# EAGLE board riffle-CTL-0.2-throughhole (EAGLE 7.3.0)
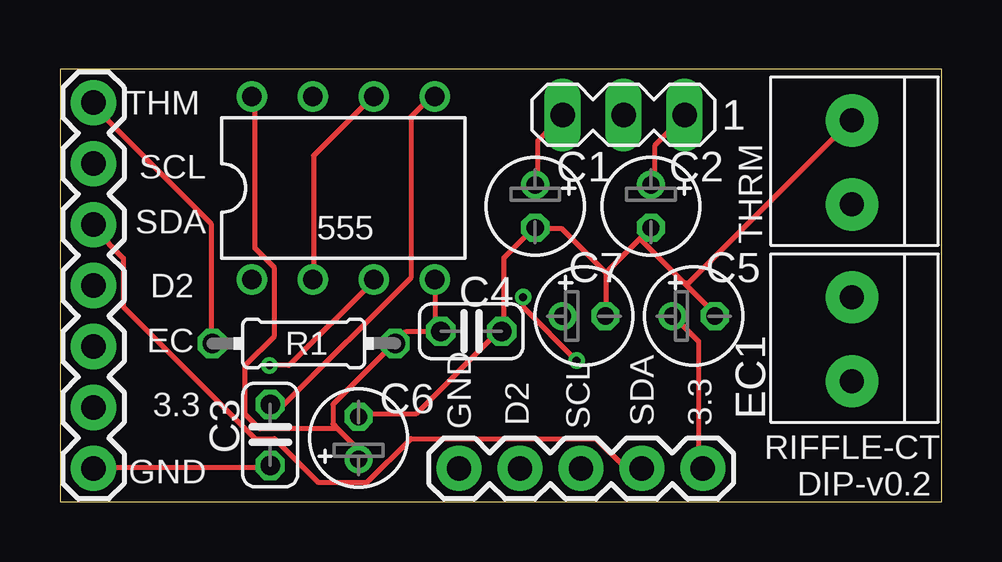
[diagram p0: board, top side]
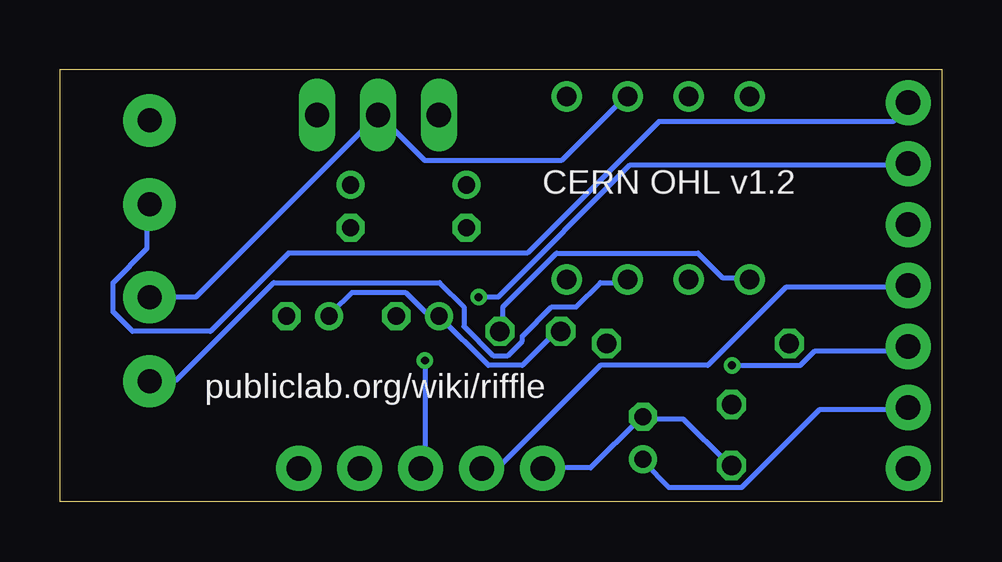
[diagram p1: board, bottom side, seen from below]

Size 36.75 x 18.02 mm. Coordinates in mm from the lower left corner, seen from the top.
Outline: 0,0 36.75,0 36.75,18.02 0,18.02 0,0
Copper layers (1*16): Top 0.0356mm / dielectric 1.5011mm / Bottom 0.0356mm
Design rules "LaenPCBOrder": minimum track width 6mil, minimum drill 13mil, track to track 6mil, track to pad 6mil, pad to pad 6mil, via to via 6mil, smd to smd 6mil, copper to edge 15mil, drill to drill 6mil, minimum pad ring 7mil, minimum via ring 7mil, stop-mask expansion 3mil, vias tented up to drill 0mil, thermal gap 10mil
Net classes: 0 default: width 0.203 mm, drill 0.33 mm, clearance 0.203 mm; 1 power: width 0.381 mm, clearance 0.254 mm

## Footprints (pad centres in the part's own frame; a part is rotated, then mirrored left to right if it is on the bottom)
E1,8-4 = drill 0.711 pad 1.168: + -0.889,0 | drill 0.711 pad 1.168 octagon: - 0.889,0
C025-024X044 = drill 0.813 octagon: 1 -1.27,0; 2 1.27,0
1X2-3.5MM = drill 1 pad 2.184: 1 1.8,0; 2 -1.7,0
DIL08 = drill 0.813 pad 1.27: 1 -3.81,-3.81; 2 -1.27,-3.81; 3 1.27,-3.81; 4 3.81,-3.81; 5 3.81,3.81; 6 1.27,3.81; 7 -1.27,3.81; 8 -3.81,3.81
1X07 = drill 1.016 pad 1.88: 1 0,0; 2 2.54,0; 3 5.08,0; 4 7.62,0; 5 10.16,0; 6 12.7,0; 7 15.24,0
1X05 = drill 1.016 pad 1.88: 1 0,0; 2 2.54,0; 3 5.08,0; 4 7.62,0; 5 10.16,0
0204/7 = drill 0.813 octagon: 1 -3.81,0; 2 3.81,0
MA03-1 = drill 1.016 long: 1 -2.54,0; 2 0,0; 3 2.54,0

## Placement (x,y rotation side)
C1  10µ  [E1,8-4]  19.81,12.32 270 top
C2  .1  [E1,8-4]  24.64,12.32 270 top
C3  0.01µ  [C025-024X044]  8.76,2.79 90 top
C4  0.1µ  [C025-024X044]  17.14,7.11 0 top
C5  .1µ  [E1,8-4]  26.42,7.75 0 top
C6  1u  [E1,8-4]  12.45,2.67 90 top
C7  10µ  [E1,8-4]  21.84,7.75 0 top
EC1  1X2-3.5MM  [1X2-3.5MM]  33.02,6.73 90 top
IC1  LM555N  [DIL08]  11.81,13.08 0 top
JP1  [1X07]  1.4,16.64 270 top
JP2  [1X05]  16.64,1.4 0 top
R1  10k  [0204/7]  10.16,6.6 0 top
SV1  [MA03-1]  23.5,16.13 180 top
THRM  1X2-3.5MM  [1X2-3.5MM]  33.02,14.1 90 top

## Library data of the parts
C1-C7 R1 = resistor
EC1 THRM = adafruit
IC1 = linear
JP1 JP2 = SparkFun-Connectors
SV1 = con-lstb; OC_FARNELL: unknown; OC_NEWARK: unknown

## Nets
D2: JP1.4 JP2.2
EC: EC1.2 IC1.3 JP1.5
GND: C1.- C2.- C3.1 C4.2 C5.- C6.- C7.- IC1.1 JP1.7 JP2.1 THRM.1
N$1: C1.+ SV1.3
N$3: EC1.1 IC1.2 IC1.6 SV1.2
N$4: C2.+ SV1.1
N$7: C3.2 IC1.5
SCL: JP1.2 JP2.3
SDA: JP1.3 JP2.4
THRM: JP1.1 R1.1 THRM.2
VCC: C4.1 C5.+ C6.+ C7.+ IC1.4 IC1.8 JP1.6 JP2.5 R1.2

## Tracks (layer width: path | path; a pad name or v marks a point on that pad's centre or on a via)
D2
  Bottom 0.203: JP2.2 19.1,1.42 18.49,1.42 14.22,5.69 9.75,5.69 6.5,8.94 1.42,8.94 JP1.4
EC  (via drill 0.33)
  Top 0.203: v8.74,5.69 9.55,5.69 13.01,9.14 IC1.3
  Bottom 0.203: IC1.3 13.21,9.14 14.22,9.14 15.24,8.13 16.26,8.13 17.48,6.91 17.48,6.71 18.09,6.1 18.69,6.1 19.91,7.32 19.91,8.13 20.93,9.14 27.84,9.14 31.9,5.08 32.92,5.08 EC1.2 | v8.74,5.69 5.89,5.69 5.28,6.3 1.42,6.3 JP1.5
GND
  Top 0.203: JP1.7 1.42,1.42 8.74,1.42 C3.1 | 22.76,9.55 22.76,7.92 C7.- | C2.- 24.18,10.97 | 24.18,10.97 22.76,9.55 | 24.18,10.97 26.01,9.14 | 26.01,9.14 27.23,7.92 C5.- | 22.76,9.55 20.93,11.38 19.91,11.38 C1.- 19.71,11.38 18.49,10.16 18.49,7.11 C4.2 18.29,7.11 14.83,3.66 12.6,3.66 C6.- | 26.01,9.14 26.21,9.14 32.92,15.85 THRM.1
  Bottom 0.203: C3.1 8.94,1.63 10.77,3.45 12.39,3.45 C6.- 12.6,3.45 14.63,1.42 16.46,1.42 JP2.1 | IC1.1 8.13,9.35 9.14,9.35 10.16,10.36 16.05,10.36 18.29,8.13 18.29,7.11 C4.2
N$1
  Top 0.203: C1.+ 19.91,13.21 19.91,15.04 20.93,16.05 SV1.3
N$3
  Top 0.203: IC1.2 10.57,9.35 10.57,14.43 13.01,16.87 IC1.6
  Bottom 0.203: IC1.6 13.21,16.87 15.85,14.22 21.54,14.22 23.37,16.05 SV1.2 31.09,8.53 32.92,8.53 EC1.1
N$4
  Top 0.203: C2.+ 24.79,13.21 24.79,14.83 26.01,16.05 SV1.1
N$7
  Top 0.203: C3.2 9.35,4.06 14.63,9.35 14.63,16.05 15.44,16.87 IC1.5
SCL  (via drill 0.33)
  Top 0.203: v21.54,5.89 19.3,8.13 v19.3,8.53
  Bottom 0.203: v21.54,5.89 21.54,1.42 JP2.3 | v19.3,8.53 18.49,8.53 13.01,14.02 1.42,14.02 JP1.2
SDA
  Top 0.203: JP2.4 24.18,1.42 23.57,1.42 22.35,2.64 14.63,2.64 12.8,0.81 10.77,0.81 8.94,2.64 8.13,2.64 2.64,8.13 2.64,10.16 1.42,11.38 JP1.3
THRM
  Top 0.203: R1.1 6.3,6.71 6.3,11.58 1.42,16.46 JP1.1
  Bottom 0.203: THRM.2 33.12,12.39 33.12,10.57 34.54,9.14 34.54,7.92 33.73,7.11 30.48,7.11 27.23,10.36 17.27,10.36 11.79,15.85 2.03,15.85 1.42,16.46 JP1.1
VCC
  Top 0.203: JP2.5 26.62,1.42 26.62,6.71 25.6,7.72 C5.+ | 11.58,3.05 11.38,3.25 11.38,4.06 13.82,6.5 R1.2 14.02,6.71 14.43,7.11 15.65,7.11 | 11.58,3.05 12.39,2.23 12.39,1.83 C6.+ | 15.65,7.11 C4.1 15.85,7.11 | 15.65,7.11 15.65,9.14 IC1.4 | 11.58,3.05 8.33,3.05 7.72,3.66 7.72,5.69 8.94,6.91 8.94,9.75 8.13,10.57 8.13,16.87 IC1.8
  Bottom 0.203: C5.+ 25.4,7.92 24.59,8.74 22.35,8.74 21.54,7.92 21.13,7.92 C7.+ 18.9,5.69 17.48,5.69 16.05,7.11 C4.1 | JP1.6 1.42,3.86 5.08,3.86 8.33,0.61 11.38,0.61 12.39,1.63 C6.+

## Text on the board
tPlace: THM | SCL | SDA | 555 | D2 | EC | 3.3 | GND | D2 | SCL | SDA | 3.3 | RIFFLE-CT | GND | DIP-v0.2
bPlace: CERN OHL v1.2 | publiclab.org/wiki/riffle